# Altium PCB PCB2.PcbDoc
Units mil, origin at the board's own origin, x right, y up, seen from the top; angles counter-clockwise.
Board outline 5770 x 2430 mil, 2 copper layers (Top Layer, Bottom Layer); 22 components, 17 nets, 95 pads, 0 vias.
Unrouted connection lines stored in the file: 1.
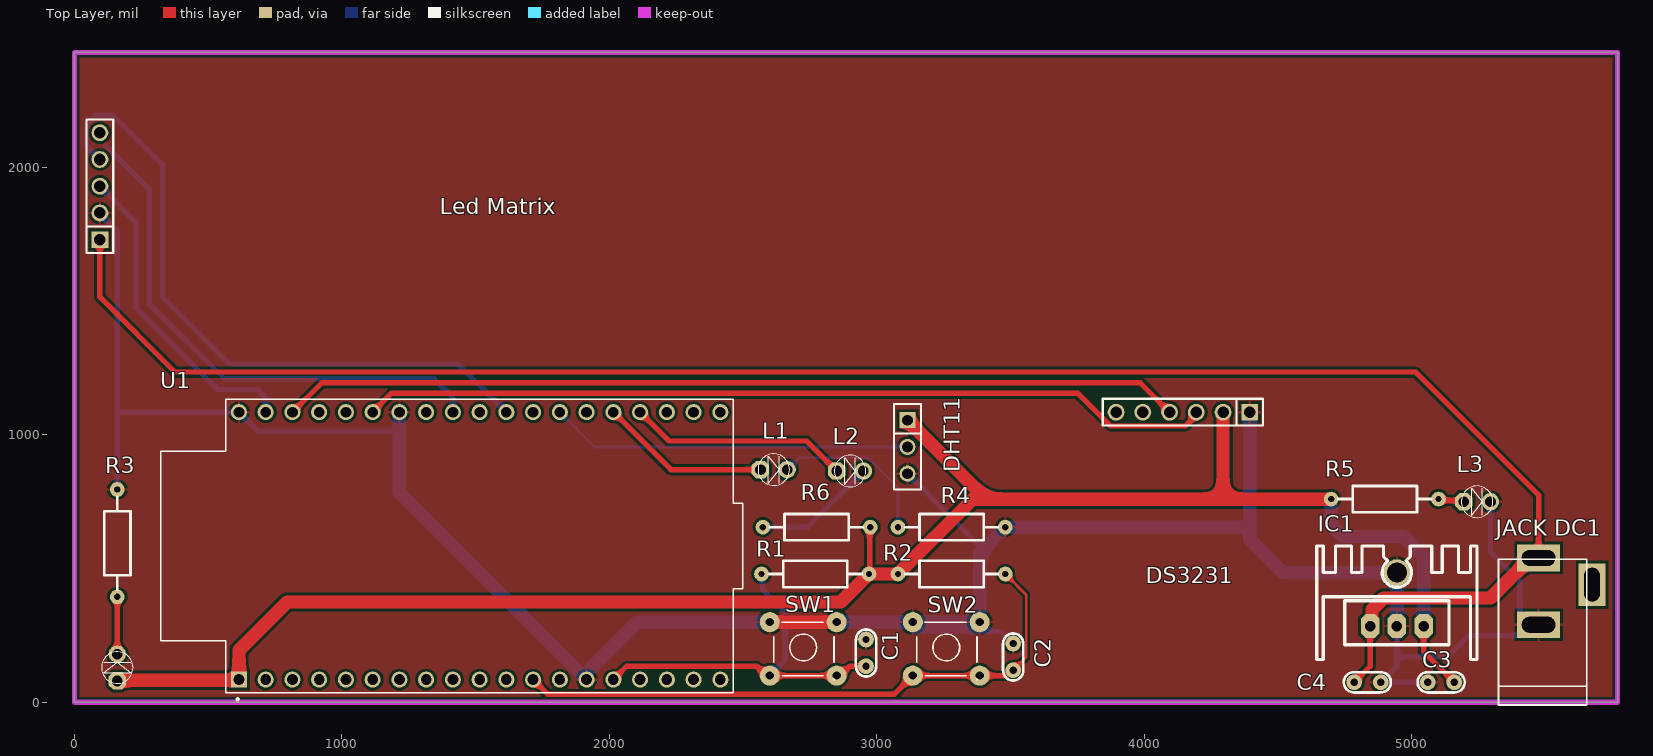
[diagram p0: Top Layer view]
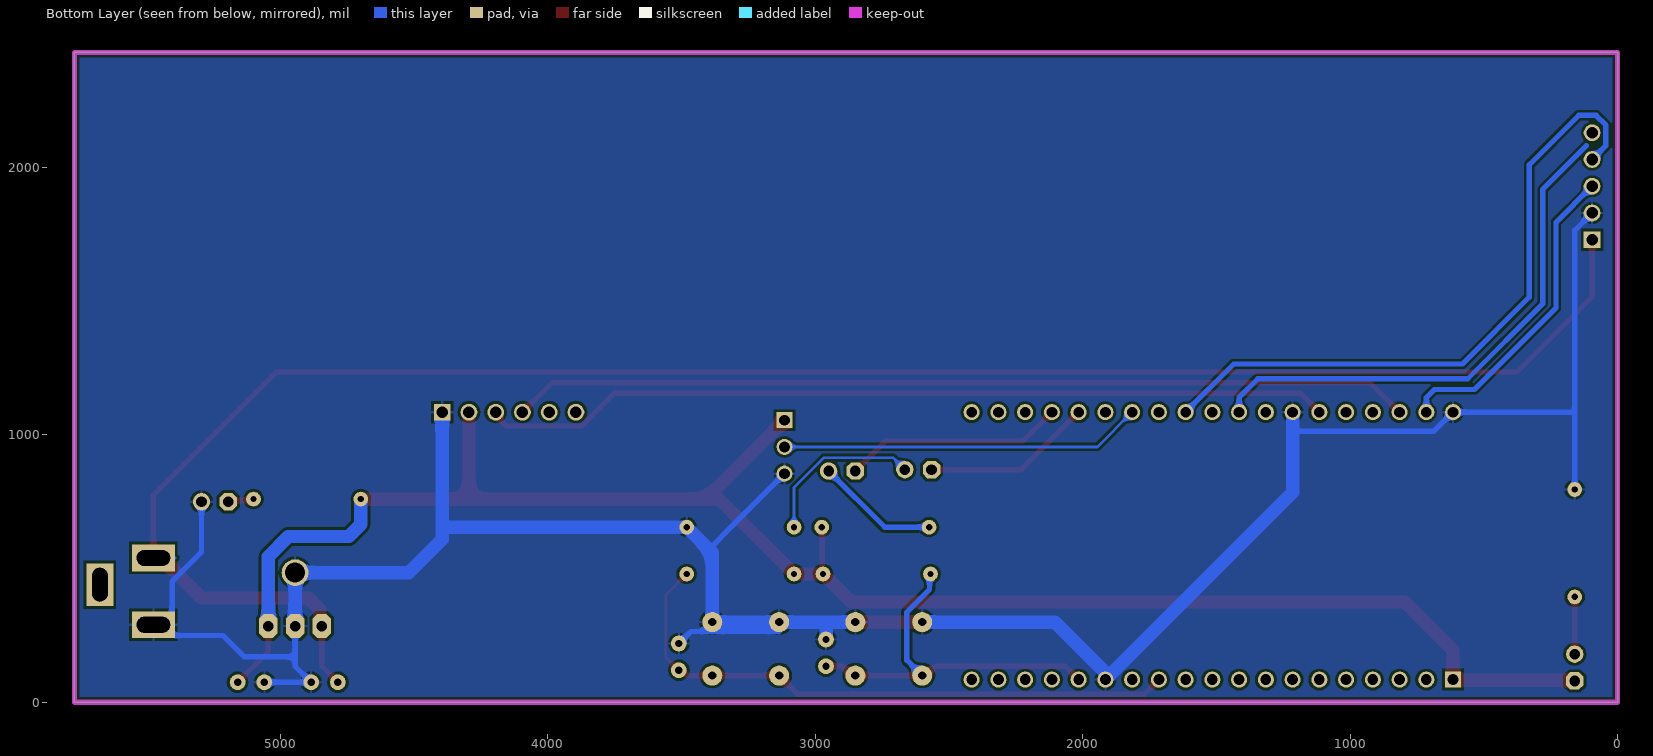
[diagram p1: Bottom Layer view, seen from below]
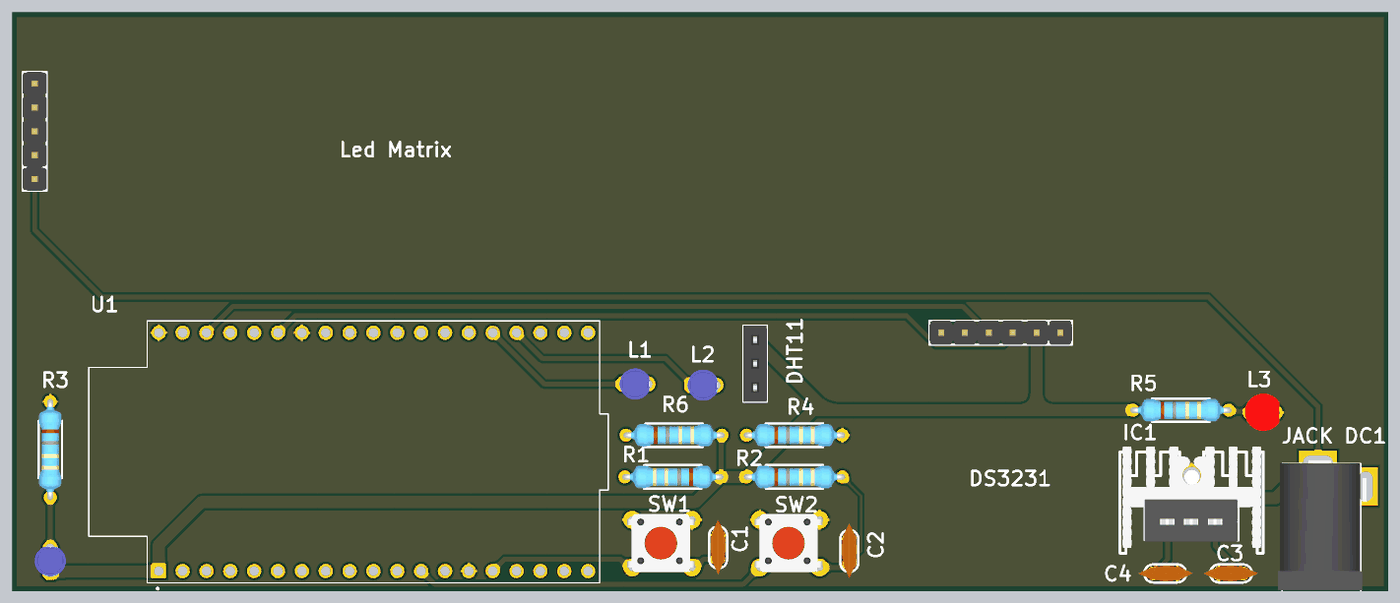
[diagram p2: 3D render of the assembled board from above, using the file's embedded part models]

## Layer stack, top to bottom
Top Solder: solder mask 0.4, Solder Resist, Dk 3.5
Top Layer: signal copper 1.4
Dielectric 1: dielectric 12.6, FR-4, Dk 4.8
Bottom Layer: signal copper 1.4
Bottom Solder: solder mask 0.4, Solder Resist, Dk 3.5

## Board outline
0,0 5770,0 5770,2430 0,2430

## Design rules (kind name [scope] priority, off if disabled: settings)
Clearance [All] p1: gap=10 ignorepadtopadclearanceinfootprint=FALSE except(0: Arc-Hole Track-Hole SMDPad-Hole THPad-Hole Via-Hole Fill-Hole Poly-Hole Region-Hole Text-Hole)
PolygonConnect [All] p1: connectstyle=Relief reliefconductorwidth=10 reliefentries=4 polygonreliefangle="90 Angle" airgapwidth=10
RoutingVias [All] p1: holewidth=35 width=40 viastyle="Through Hole" minholewidth=35 minwidth=40 maxholewidth=35 maxwidth=40
SolderMaskExpansion [All] p1: expansion=4
Width [All] p1: maxlimit=50 minlimit=10 preferedwidth=20
30 further rules are at their usual default settings.

## Components (designator, comment, footprint, x,y, rotation, side; value= is the part's Value field where it differs from the comment)
C1 "104" "tu gom" 2960,185 r90 top
C2 "104" "tu gom" 3510,170 r90 top
C3 "151" "tu gom" 5110,75 r180 top
C4 "151" "tu gom" 4835,75 r0 top
DHT11 "JP 1x3 2.54" "JP 1x3 CT" 3115,1055 r270 top (schematic designator JP3)
DS3231 "JP 1x6 2.54" "JP 1x6 DT" 4395,1085 r180 top (schematic designator JP1)
IC1 "LM7805" QTO-220H3 4845,285 r0 top
"JACK DC1" "JACK DC 5.5" "JACK DC 5.5" 5575,415 r90 top value="Jac DC"
L1 "LED 3mm" LED-3MM-BLUE 2620,870 r0 top
L2 "LED 3mm" LED-3MM-BLUE 2905,865 r0 top
L3 "LED 3mm" LED-3MM-RED 5195,750 r0 top
"Led Matrix" "JP 1x5 2.54" "JP 1x5 DT" 95,1730 r90 top (schematic designator JP2)
R1 "10k" "tro vach 1/4w" 2770,480 r0 top
R2 "10k" "tro vach 1/4w" 3280,480 r180 top
R3 "100R" "tro vach 1/4w" 160,595 r90 top
R4 "100R" "tro vach 1/4w" 3280,655 r180 top
R5 "100R" "tro vach 1/4w" 4900,760 r180 top
R6 "100R" "tro vach 1/4w" 2775,655 r180 top
SW1 "SW" SW4 2600,300 r0 top value="Button chip 4 pin"
SW2 "SW" SW4 3135,300 r0 top value="Button chip 4 pin"
U1 "DEVKIT_V1_ESP32-WROOM-32" MODULE_DEVKIT_V1_ESP32-WROOM-32 1514.61,585 r90 top
? "LED 3mm" LED-3MM-BLUE 160,135 r90 top

## Footprints (in the part's own frame and the unit in brackets; to place one, negate y for a bottom-side part, rotate by r counter-clockwise, add the part's x,y. Pads: shape width x height; smd on the part's side, far side on the other; paste and mask are expansions set on the pad)
"JACK DC 5.5" [mil] "Jac DC input"
  rect 100x160 hole 59.06 slot 125.98 at 90 deg: 1(125,100) 2(-125,100)
  rect 160x100 hole 59.06 slot 125.98 at 0 deg: 3(25,-100)
  silkscreen extent -425,-80 120,250, body extent -410,-105 134,269, height 434
"JP 1x3 CT" [mm]
  rect 1.52x1.52 hole 1.02: 1(0,0)
  round 1.52 hole 1.02: 2(2.54,0) 3(5.08,0)
  silkscreen extent -1.52,-1.27 6.6,1.27, body extent -1.52,-1.25 6.6,1.25, height 8.51
"JP 1x5 DT" [mm] "5 pins, 1 row, straight, gold plating"
  rect 1.6x1.6 hole 1.1: 1(0,0)
  round 1.6 hole 1.1: 2(2.54,0) 3(5.08,0) 4(7.62,0) 5(10.16,0)
  silkscreen extent -1.27,-1.27 11.43,1.27, body extent -1.27,-1.27 11.43,1.27, height 8.54
"JP 1x6 DT" [mm] "6 pins, 1 row, straight, gold plating"
  rect 1.6x1.6 hole 1.1: 1(0,0)
  round 1.6 hole 1.1: 2(2.54,0) 3(5.08,0) 4(7.62,0) 5(10.16,0) 6(12.7,0)
  silkscreen extent -1.27,-1.27 13.97,1.27, body extent -1.27,-1.27 13.97,1.27, height 8.54
LED-3MM-BLUE [mil]
  oct 65x65 hole 40: 1(-55,0)
  round 65 hole 40: 2(45,0)
  silkscreen extent -64,-59 54,59, body extent -72,-65 54,65, height 184
LED-3MM-RED [mil]
  oct 65x65 hole 40: 1(0,0)
  round 65 hole 40: 2(100,0)
  silkscreen extent -9,-59 109,59, body extent -27,-77 117,80, height 181
MODULE_DEVKIT_V1_ESP32-WROOM-32 [mm]
  rect 1.53x1.53 / inner round 1.53 / far side rect 1.53x1.53 hole 1.02: 1(-12.7,22.85)
  round 1.53 hole 1.02: 2(-12.7,20.31) 3(-12.7,17.77) 4(-12.7,15.23) 5(-12.7,12.69) 6(-12.7,10.15) 7(-12.7,7.61) 8(-12.7,5.07) 9(-12.7,2.53) 10(-12.7,-0.01) 11(-12.7,-2.55) 12(-12.7,-5.09) 13(-12.7,-7.63) 14(-12.7,-10.17) 15(-12.7,-12.71) 16(-12.7,-15.25) 17(-12.7,-17.79) 18(-12.7,-20.33) 19(-12.7,-22.87) 20(12.7,-22.87) 21(12.7,-20.33) 22(12.7,-17.79) 23(12.7,-15.25) 24(12.7,-12.71) 25(12.7,-10.17) 26(12.7,-7.63) 27(12.7,-5.09) 28(12.7,-2.55) 29(12.7,-0.01) 30(12.7,2.53) 31(12.7,5.07) 32(12.7,7.61) 33(12.7,10.15) 34(12.7,12.69) 35(12.7,15.23) 36(12.7,17.77) 37(12.7,20.31) 38(12.7,22.85)
  silkscreen extent -14.67,-25 13.95,30.3
QTO-220H3 [mil] "TO-220 1-2-3"
  oct 70x90 hole 40: 1(0,0) 2(100,0) 3(200,0)
  round 100 hole 75: 2(100,200)
  silkscreen extent -200,-125 400,300, body extent -190,-102 392,323, height 984
SW4 [mil] "SW button 4pin, 250 x250 mil"
  round 75 hole 31: 1(0,0) 2(250,-200) 3(250,0) 4(0,-200)
  silkscreen extent 15,-215 240,0, body extent -36,-220 276,24, height 276
"tro vach 1/4w" [mm]
  round 1.4 hole 0.6: 1(-5.1,0) 2(5.1,0)
  silkscreen extent -4.39,-1.25 4.42,1.25, body extent -5.38,-1.2 5.38,1.2, height 2.41
"tu gom" [mm] "Tu gom mini"
  round 1.5 hole 0.7: 1(-1.27,0) 2(1.27,0)
  silkscreen extent -2.25,-0.97 2.22,0.97, body extent -2.92,-0.85 2.92,0.85, height 6.12

## Part data
C1 C2: library part "Tu gom 104 50V", "C?m", Chung_Loai=C?m, Don_Vi=Con, Ma_Hang=MH004761, So_Chan=2, Ten_Linh_Kien="T? g?m 104 100nF 50V"
C3 C4: library part "Tu gom 151 50V", "C?m", Chung_Loai=C?m, Don_Vi=Con, Ma_Hang=MH004766, So_Chan=2, Ten_Linh_Kien="T? g?m 150P 151 50V"
DHT11: library part "JP 1x3 2.54 Cai Thang", "C?m", Chung_Loai=C?m, Don_Vi=Con, Ma_Hang=MH004006, Ten_Linh_Kien="Jump Ðon Cái 2.54MM 1x20P Th?ng"
DS3231: library part "JP 1x6 2.54 Duc Thang", "C?m", Chung_Loai=C?m, Don_Vi=Con, Ma_Hang=MH000903, Ten_Linh_Kien="Jump Ðon Ð?c 2.54MM 1x40P Th?ng 11MM"
IC1: library part LM78xx, "On ap +, from + 5 to + 24VDC", =LM7808
L1 L2 ?: library part "LED 3mm Xanh Duong", "C?m", Chung_Loai=C?m, Don_Vi=Con, Ma_Hang=MH009003, Ten_Linh_Kien="LED 3MM Xanh Duong SS (1000c)"
L3: library part "LED 3mm Do", "C?m", Chung_Loai=C?m, Don_Vi=Con, Ma_Hang=MH003892, Ten_Linh_Kien="Led 3MM Ph? Ð? (10c)"
"Led Matrix": library part "JP 1x5 2.54 Duc Thang", "C?m", Chung_Loai=C?m, Don_Vi=Con, Ma_Hang=MH000903, Ten_Linh_Kien="Jump Ðon Ð?c 2.54MM 1x40P Th?ng 11MM"
R1 R2: library part "Tro Vach 1/4W 5% 10k", "Cam", Chung_Loai=C?m, Don_Vi=Con, Ma_Hang=MH007354, So_Chan=2, Ten_Linh_Kien="Tr? V?ch 1/4w 5% 10K"
R3 R4 R5 R6: library part "Tro Vach 1/4W 5% 100R", "C?m", Chung_Loai=C?m, Don_Vi=Con, Ma_Hang=MH007353, So_Chan=2, Ten_Linh_Kien="Tr? V?ch 1/4w 5% 100R"
SW1 SW2: library part SW4, "Switch button 4 pin"
U1: "WROOM-32 Development Board ESP32 ESP-32S WiFi Bluetooth Dev Module", Package=Package, Check_prices=https://www.snapeda.com/parts/DEVKIT%20V1%20ESP32-WROOM-32/Espressif+Systems/view-part/?ref=eda, MF="Espressif Systems", MP="DEVKIT V1 ESP32-WROOM-32", SnapEDA_Link=https://www.snapeda.com/parts/DEVKIT%20V1%20ESP32-WROOM-32/Espressif+Systems/view-part/?ref=snap

## Nets (pads, with @x,y where several pads share a name; then routed paths per layer and width w, separated by ;. In a path a pad name is that pad's centre, name@x,y a point inside that pad or via, vN(x,y) a via of type N, cw(c..) or ccw(c..) an arc to the next point about the centre after c; other vN are vias at no path point)
3v3: ?.1 C3.1 DHT11.1 DS3231.2 IC1.3 R1.2 R2.2 R5.2 R6.1 U1.1 | length 6812.2
  Top Layer w20: R1.2 2973.29,482.5 2973.29,652.5 R6.1 ; IC1.3 5045,190 C3.1
  Top Layer w50: ?.1 162.5,82.5 612.5,82.5 U1.1 615,195 795,375 2865.79,375 R1.2 R2.2 3359.21,760 3410,760 ; DHT11.1 3410,760 ; DS3231.2 4295,760 ; R5.2 4295,760 ; 3410,760 4295,760
  Bottom Layer w50: R5.2 4700.19,759.02 4700.19,664.81 4745,620 4970,620 5045,545 IC1.3
5v: "JACK DC1.1" "Led Matrix.1" C4.1 IC1.1 | length 7221.2
  Top Layer w20: 95,1730 95,1515 375,1235 5015,1235 5475,775 5475,540 ; C4.1 4845,135 IC1.1
  Top Layer w50: IC1.1 4852.14,292.14 4852.14,347.14 4895,390 5295,390 5445,540 5475,540
  Bottom Layer w10: 5393,540 5475,540
button1: C1.1 R1.1 SW1.2 SW1.4 U1.15 | length 1435.2
  Top Layer w20: U1.15 2065.12,135.12 2550,135.12 2585.12,100 SW1.4 SW1.2 2864.88,100 2899.88,135 C1.1
  Bottom Layer w20: R1.1 2572.56,476.65 2572.56,422.44 2657.5,337.5 2657.5,157.5 SW1.4
button2: C2.1 R2.1 SW2.2 SW2.4 U1.12 | length 2267.8
  Top Layer w10: R2.1 3559,401.79 3559,169 C2.1
  Top Layer w20: U1.12 1770,30 3065,30 SW2.4 SW2.2 3479.43,100 3499.43,120 C2.1
CS: "Led Matrix.4" U1.28 | length 2486.2
  Bottom Layer w20: 95,2030 43.5,2081.5 43.5,2158.5 80,2195 145,2195 330,2010 330,1515 580,1265 1435,1265 U1.28
DHT11: DHT11.2 U1.26 | length 1353.8
  Bottom Layer w10: U1.26 1945,955 DHT11.2
DIN: "Led Matrix.3" U1.37 | length 1189.7
  Bottom Layer w20: 95,1930 230,1795 230,1475 535,1170 685,1170 715,1140 U1.37
GND: "JACK DC1.2" "Led Matrix.2" C1.2 C2.2 C3.2 C4.2 DHT11.3 DS3231.1 IC1.2 L3.2 R3.2 R4.1 SW1.1 SW1.3 SW2.1 SW2.3 U1.14 U1.32 U1.38 | length 10068.1
  Top Layer w50: SW1.1 SW1.3 ; C1.2@2958.27,236.73 C1.2
  Bottom Layer w20: 95,1830 160,1765 160,1090 ; R3.2 160,1090 ; U1.32 1207.3,1077.3 1207.3,1033.02 1188.28,1014 686,1014 U1.38 165,1085 160,1090 ; DHT11.3 3315,655 3385,585 3385,559.21 ; SW2.1@3135,265 3465,265 C2.2 ; IC1.2@4945,285 4945,170 ; C3.2 C4.2 4945,135 4945,170 ; L3.2 5295,561.72 5405,451.72 5405,330 5445,290 5475,290 5435,250 5215,250 5135,170 4945,170
  Bottom Layer w50: U1.32 1215,785 U1.14 1916.96,86.96 1916.96,113.53 2103.43,300 SW1.1 ; SW1.3 2955,300 ; C1.2@2961.73,236.73 C1.2 2958.27,236.73 2958.27,296.73 2955,300 ; DS3231.1 4395,655 ; IC1.2@4945,285 4945,485 4520,485 4395,610 4395,655 ; 2955,300 SW2.1 SW2.3 3385,559.21 R4.1 4395,655
led1: L1.1 U1.24 | length 639.1
  Top Layer w20: U1.24 2230,870 L1.1
led2: L2.1 U1.23 | length 826.1
  Top Layer w20: U1.23 2222.8,977.2 2737.8,977.2 L2.1
"Net _2": ?.2 R3.1 | length 214.2
  Top Layer w20: ?.2 R3.1
NetL1_2: L1.2 R4.2 | length 627.2
  Bottom Layer w10: L1.2 2710,915 2967.18,915 3079.21,802.96 R4.2
NetL2_2: L2.2 R6.2 | length 462.8
  Bottom Layer w20: R6.2 2740,655 L2.2
NetL3_1: L3.1 R5.1 | length 98.4
  Top Layer w20: R5.1 5105.79,755 5190,755 L3.1
SCK: "Led Matrix.5" U1.30 | length 1994.3
  Bottom Layer w20: 116.33,2081.5 280,1917.83 280,1490 560,1210 1345,1210 1415,1140 U1.30
SCL: DS3231.4 U1.36 | length 3371.1
  Top Layer w20: U1.36 925,1195 3985,1195 DS3231.4
SDA: DS3231.3 U1.33 | length 3199.8
  Top Layer w20: U1.33 1186,1156 3751.17,1156 3873.67,1033.5 4155,1033.5 4195,1073.5 DS3231.3 DS3231.3@4203.23,1076.77
pads on no net: "JACK DC1.3" DS3231.5 DS3231.6 U1.2 U1.3 U1.4 U1.5 U1.6 U1.7 U1.8 U1.9 U1.10 U1.11 U1.13 U1.16 U1.17 U1.18 U1.19 U1.20 U1.21 U1.22 U1.25 U1.27 U1.29 U1.31 U1.34 U1.35

## Polygon pours and split planes (outlines as drawn)
GND on Bottom Layer "Bot Poly" (solid, remove dead copper, pour order 16): 0,0 5765,0 5770,5 5770,2430 0,2430
no net on Bottom Layer "Bot Poly" (solid, remove dead copper, pour order 14): 0,2430 5770,2430 5770,0 0,0
GND on Top Layer "Bot Poly" (solid, remove dead copper, pour order 18): 0,2430 5770,2430 5770,0 0,0

## Keep-outs
Keep-Out Layer:
  the board outline again, w20